# Altium PCB bb8_v2.PcbDoc
Units mil, origin at the board's own origin, x right, y up, seen from the top; angles counter-clockwise.
Board outline 1899.77 x 1948.77 mil, 2 copper layers (Top Layer, Bottom Layer); 6 components, 2 nets, 35 pads, 4 vias.
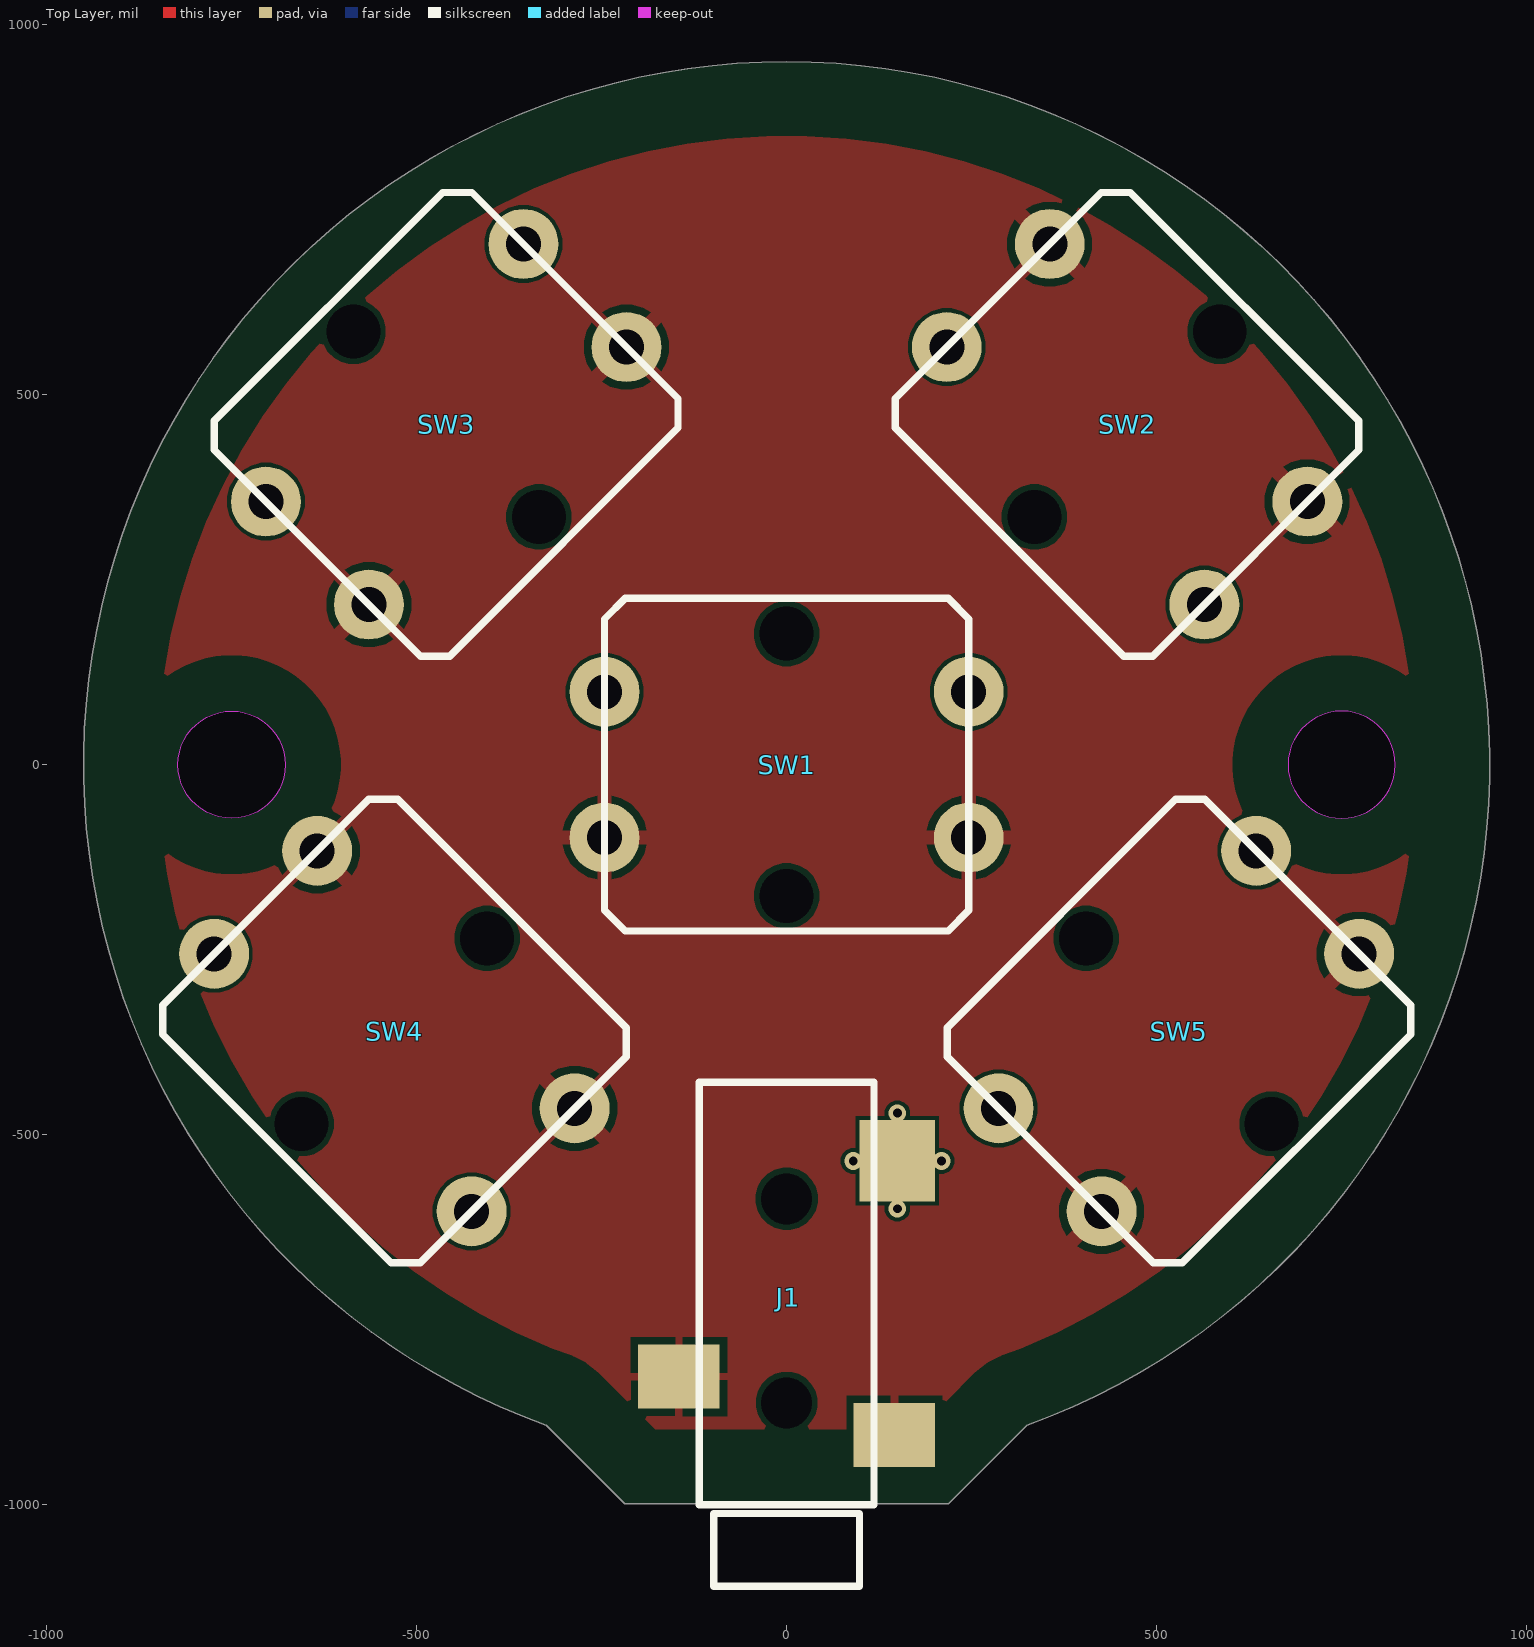
[diagram p0: Top Layer view]
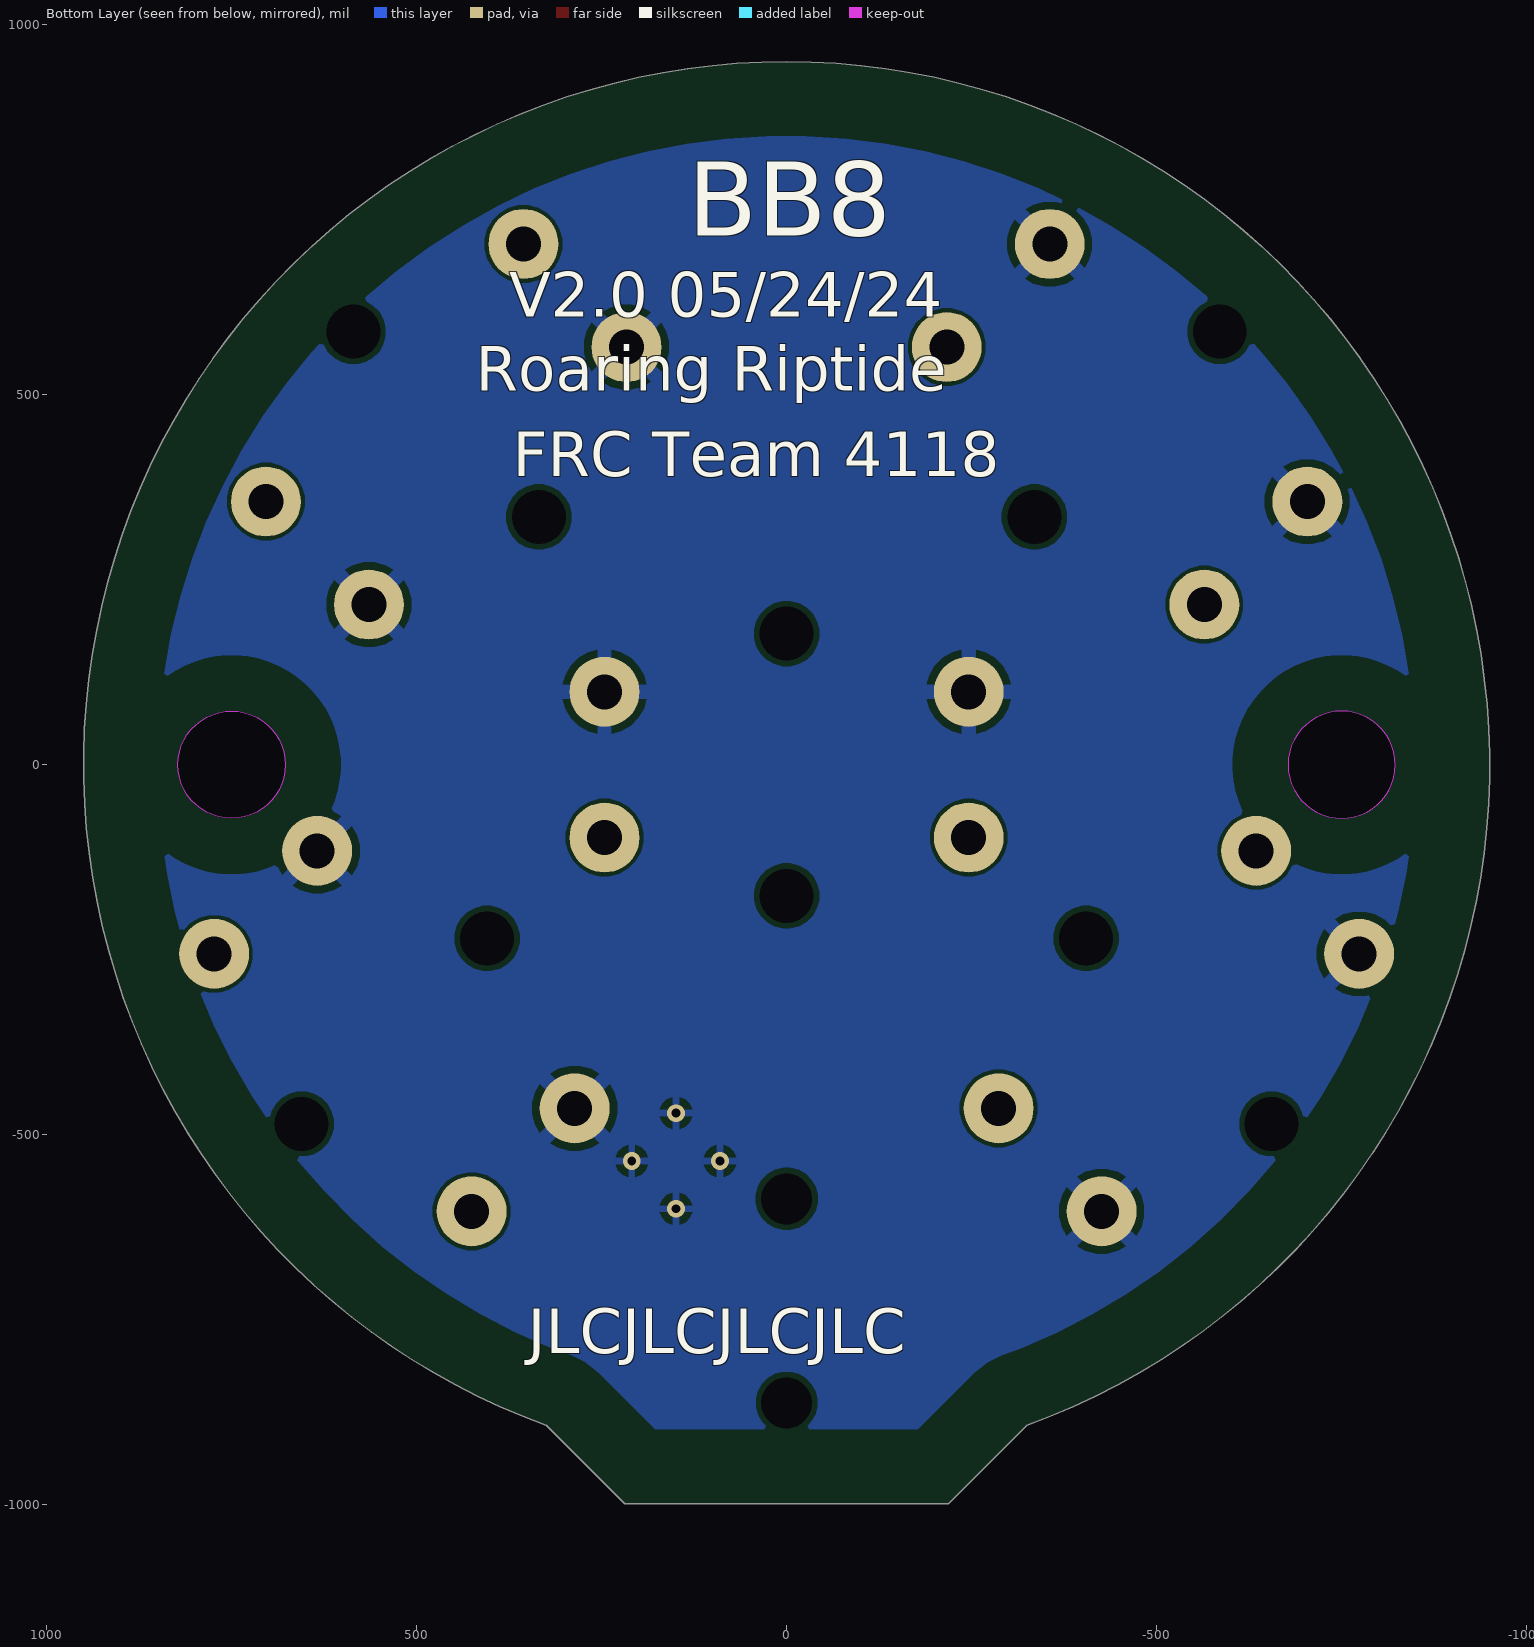
[diagram p1: Bottom Layer view, seen from below]

## Layer stack, top to bottom
Top Solder: solder mask 0.4, Solder Resist, Dk 3.5
Top Layer: signal copper 1.4
Dielectric 1: dielectric 12.6, FR-4, Dk 4.8
Bottom Layer: signal copper 1.4
Bottom Solder: solder mask 0.4, Solder Resist, Dk 3.5

## Board outline
-324.92,-892.71 -218.85,-998.77 218.85,-998.77 324.92,-892.71 ccw(c0,0)
cut-out: 677.5,0 ccw(c750,0) 750,-72.5 ccw(c750,0) 822.5,0 ccw(c750,0) 750,72.5 ccw(c750,0)
cut-out: -750,-72.5 cw(c-750,0) -822.5,0 cw(c-750,0) -750,72.5 cw(c-750,0) -677.5,0 cw(c-750,0)

## Design rules (kind name [scope] priority, off if disabled: settings)
BoardOutlineClearance BoardOutlineClearance_1 [not OnLayer('Top Overlay')] p1: gap=15 ignorepadtopadclearanceinfootprint=FALSE except(0: Arc-SplitContinuation Track-SplitContinuation SMDPad-SplitContinuation THPad-SplitContinuation Via-SplitContinuation Fill-SplitContinuation Poly-SplitContinuation Region-SplitContinuation Text-SplitContinuation; 75: Poly-CutoutEdge; 100: Poly-OutlineEdge)
Clearance [All] p1: gap=5 ignorepadtopadclearanceinfootprint=FALSE except(7.5: Arc-Hole Track-Hole SMDPad-Hole THPad-Hole Via-Hole Fill-Hole Poly-Hole Region-Hole Text-Hole)
ComponentClearance [All] p1 off: gap=10 collisioncheckmode=3 verticalgap=10 showdistances=FALSE
DiffPairsRouting [All] p1: maxlimit=5.5 minlimit=4.5 mostfreqgap=5 toplayer_minwidth=7 toplayer_maxwidth=8 toplayer_prefwidth=7.5 bottomlayer_minwidth=7 bottomlayer_maxwidth=8 bottomlayer_prefwidth=7.5 maxuncoupledlength=500
FabricationTestPointUsage TestPointUsage [All] p1: valid=0 allowmultiple=FALSE
FabricationTestpoint Testpoint [All] p1: side=3 testpointundercomponent=TRUE minsize=40 maxsize=100 preferedsize=60 minholesize=0 maxholesize=40 preferedholesize=32 testpointgrid=1 allowsidetop=TRUE allowsidebottom=TRUE usegrid=TRUE gridtolerance=0.01
MatchedLengths [All] p1: tolerance=100 checknetsindiffpair=TRUE checkdiffpairvsdiffpair=FALSE checkxsignals=FALSE checkothers=FALSE
MinimumSolderMaskSliver [All] p1: minsoldermaskwidth=0
PlaneClearance [All] p1: clearance=7.5
PlaneConnect [All] p1: pad.planeconnectstyle=Relief pad.reliefexpansion=20 pad.reliefentries=4 pad.reliefconductorwidth=10 pad.reliefairgap=10 via.planeconnectstyle=Direct via.reliefexpansion=20 via.reliefentries=4 via.reliefconductorwidth=10 via.reliefairgap=10
PolygonConnect PolygonConnect_4 [All vs IsNamedPolygon('TIP_L02_P001')] p1: thpad.connectstyle=Relief thpad.reliefconductorwidth=20 thpad.reliefentries=4 thpad.polygonreliefangle="90 Angle" thpad.airgapwidth=10 smdpad.connectstyle=Relief smdpad.reliefconductorwidth=10 smdpad.reliefentries=4 smdpad.polygonreliefangle="90 Angle" smdpad.airgapwidth=10 via.connectstyle=Relief via.reliefconductorwidth=10 via.reliefentries=4 via.polygonreliefangle="90 Angle" via.airgapwidth=10
PolygonConnect PolygonConnect_3 [All vs IsNamedPolygon('TIP_L02_P001')] p2: thpad.connectstyle=Relief thpad.reliefconductorwidth=20 thpad.reliefentries=4 thpad.polygonreliefangle="90 Angle" thpad.airgapwidth=10 smdpad.connectstyle=Relief smdpad.reliefconductorwidth=10 smdpad.reliefentries=4 smdpad.polygonreliefangle="90 Angle" smdpad.airgapwidth=10 via.connectstyle=Relief via.reliefconductorwidth=10 via.reliefentries=4 via.polygonreliefangle="90 Angle" via.airgapwidth=10
PolygonConnect PolygonConnect_2 [All vs IsNamedPolygon('SLEEVE_L01_P000')] p3: thpad.connectstyle=Relief thpad.reliefconductorwidth=20 thpad.reliefentries=4 thpad.polygonreliefangle="90 Angle" thpad.airgapwidth=10 smdpad.connectstyle=Relief smdpad.reliefconductorwidth=10 smdpad.reliefentries=4 smdpad.polygonreliefangle="90 Angle" smdpad.airgapwidth=10 via.connectstyle=Relief via.reliefconductorwidth=10 via.reliefentries=4 via.polygonreliefangle="90 Angle" via.airgapwidth=10
PolygonConnect PolygonConnect_1 [All vs IsNamedPolygon('SLEEVE_L01_P000') Or IsNamedPolygon('TIP_L02_P001')] p4: thpad.connectstyle=Relief thpad.reliefconductorwidth=20 thpad.reliefentries=4 thpad.polygonreliefangle="90 Angle" thpad.airgapwidth=10 smdpad.connectstyle=Relief smdpad.reliefconductorwidth=10 smdpad.reliefentries=4 smdpad.polygonreliefangle="90 Angle" smdpad.airgapwidth=10 via.connectstyle=Relief via.reliefconductorwidth=10 via.reliefentries=4 via.polygonreliefangle="90 Angle" via.airgapwidth=10
PolygonConnect [All] p5: connectstyle=Relief reliefconductorwidth=10 reliefentries=4 polygonreliefangle="90 Angle" airgapwidth=10
RoutingVias [All] p1: holewidth=12 width=24 viastyle="Through Hole" minholewidth=12 minwidth=24 maxholewidth=12 maxwidth=24
SolderMaskExpansion [All] p1: expansion=1.97 istentingtop=FALSE
Width [All] p1: maxlimit=100 minlimit=5 preferedwidth=5 minimp=50.000000 maximp=50.000000 favimp=50.000000
23 further rules are at their usual default settings.

## Components (designator, comment, footprint, x,y, rotation, side; value= is the part's Value field where it differs from the comment)
J1 "SJ-3523" SJ-352X 0,-1000 r90 top
SW1 "SW_4118" SW_4118 0,0 r180 top
SW2 "SW_4118" SW_4118 460,460 r315 top
SW3 "SW_4118" SW_4118 -460,460 r225 top
SW4 "SW_4118" SW_4118 -530,-360 r315 top
SW5 "SW_4118" SW_4118 530,-360 r225 top

## Footprints (in the part's own frame and the unit in brackets; to place one, negate y for a bottom-side part, rotate by r counter-clockwise, add the part's x,y. Pads: shape width x height; smd on the part's side, far side on the other; paste and mask are expansions set on the pad)
SJ-352X [mm]
  rect 2.2x2.8 smd: 1(2.4,-3.7) 3(4.4,3.7)
  rect 2.8x2.6 smd: 2(11.8,-3.8)
  round 0 hole 1.75 unplated: ""(3.5,0) ""(10.5,0)
  silkscreen extent -2.8,-3 14.5,3
SW_4118 [mm]
  round 2.4 hole 1.2: 1(-6.25,2.5) 2(6.25,2.5) 3(6.25,-2.5) 4(-6.25,-2.5)
  round 1.524 hole 1.85: ""(0,4.5) ""(0,-4.5)
  silkscreen extent -6.25,-5.71 6.25,5.71

## Via types
v1: diameter 24, hole 12, Top Layer to Bottom Layer, 4 vias

## Nets (pads, with @x,y where several pads share a name; then routed paths per layer and width w, separated by ;. In a path a pad name is that pad's centre, name@x,y a point inside that pad or via, vN(x,y) a via of type N, cw(c..) or ccw(c..) an arc to the next point about the centre after c; other vN are vias at no path point)
SLEEVE: J1.1 J1.3 SW1.1 SW1.2 SW2.1 SW2.2 SW3.1 SW3.2 SW4.1 SW4.2 SW5.1 SW5.2
TIP: J1.2 SW1.3 SW1.4 SW2.3 SW2.4 SW3.3 SW3.4 SW4.3 SW4.4 SW5.3 SW5.4
  other v1: 149.61,-600 90,-535.43 209.21,-535.43 149.61,-470.87
pads on no net: J1. SW1. SW2. SW3. SW4. SW5.

## Polygon pours and split planes (outlines as drawn)
SLEEVE on Top Layer "SLEEVE_L01_P000" (solid, pour order 0): -944.88,0 ccw(c0,0) 0,-944.88 ccw(c0,0) 944.88,0 ccw(c0,0) 0,944.88 ccw(c0,0)
TIP on Bottom Layer "TIP_L02_P001" (solid, pour order 1): -944.88,0 ccw(c0,0) 0,-944.88 ccw(c0,0) 944.88,0 ccw(c0,0) 0,944.88 ccw(c0,0)

## Silkscreen, mask and mechanical layers (free items; w line width, h text height)
Bottom Overlay:
  text "BB8" at 133.29,715 h100
  text "V2.0 05/24/24" at 374.88,605 h60
  text "Roaring Riptide" at 419.86,504.99 h60
  text "FRC Team 4118" at 369.88,390 h60
  text "JLCJLCJLCJLC" at 349.89,-795 h60
Mechanical 1:
  circle w10: c-750,0 r72.5
  circle w10: c750,0 r72.5
  lines w10: -324.92,-892.71 cw(c0,0) 324.92,-892.71 218.85,-998.77 -218.85,-998.77 -324.92,-892.71